# Altium PCB PCB1.PcbDoc
Units mil, origin at the board's own origin, x right, y up, seen from the top; angles counter-clockwise.
Board outline 6000 x 4000 mil, 2 copper layers (Top Layer, Bottom Layer); 52 components, 24 nets, 134 pads, 10 vias.
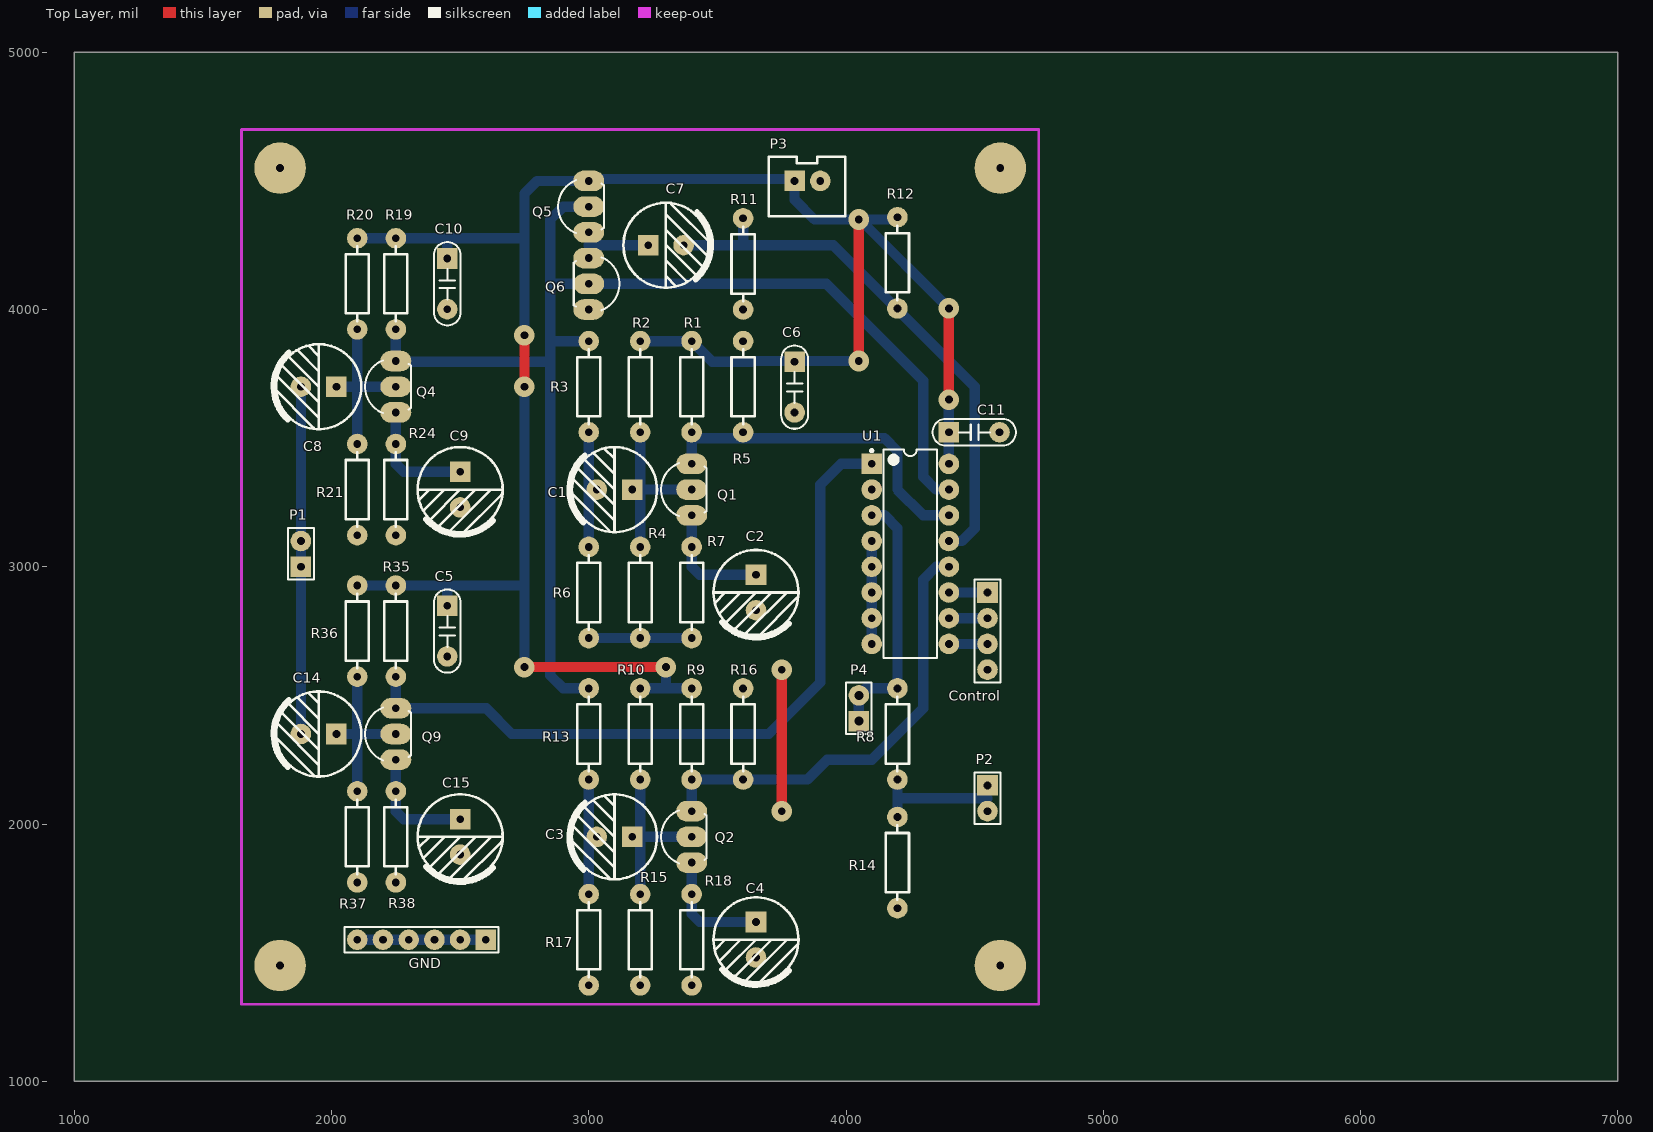
[diagram p0: Top Layer view]
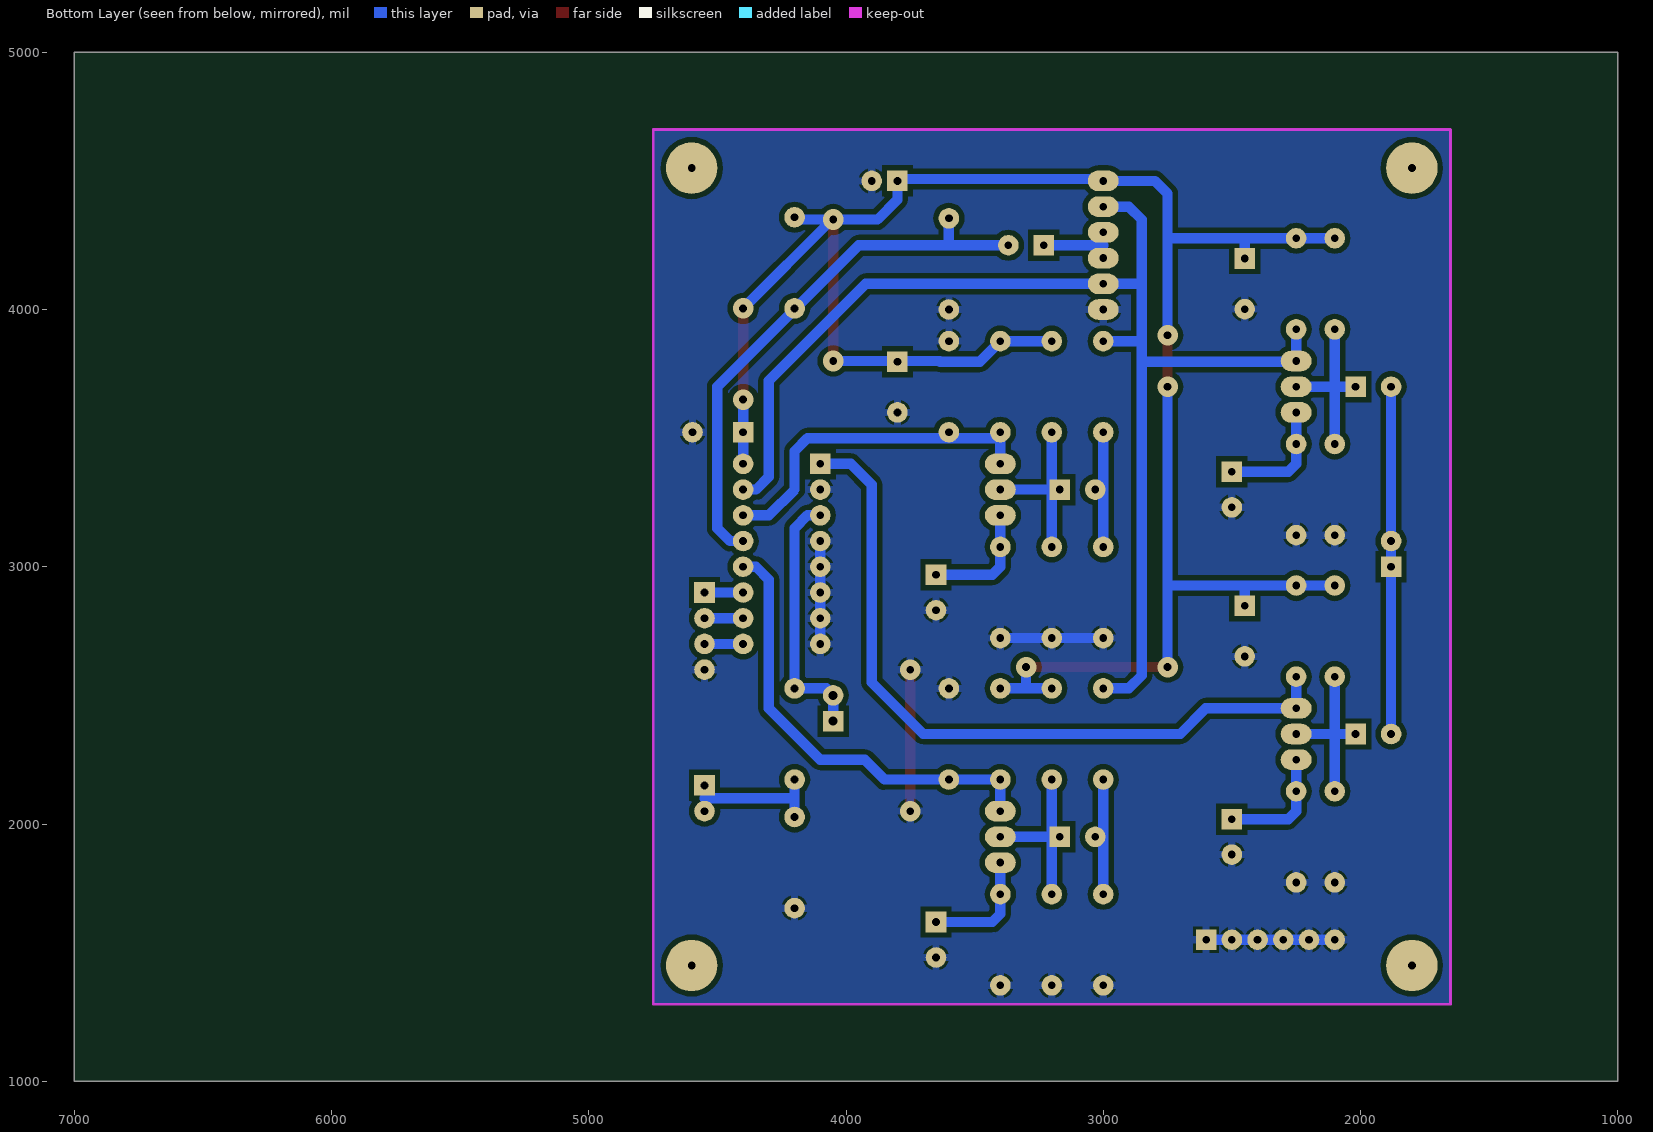
[diagram p1: Bottom Layer view, seen from below]

## Layer stack, top to bottom
Top Solder: solder mask 0.4, Solder Resist, Dk 3.5
Top Layer: signal copper 1.4
Dielectric 1: dielectric 12.6, FR-4, Dk 4.8
Bottom Layer: signal copper 1.4
Bottom Solder: solder mask 0.4, Solder Resist, Dk 3.5

## Board outline
1000,1000 7000,1000 7000,5000 1000,5000

## Design rules (kind name [scope] priority, off if disabled: settings)
Clearance [All] p1: gap=20 ignorepadtopadclearanceinfootprint=FALSE
PolygonConnect [All] p1: connectstyle=Relief reliefconductorwidth=30 reliefentries=4 polygonreliefangle="90 Angle" airgapwidth=10
RoutingVias [All] p1: holewidth=28 width=50 viastyle="Through Hole" minholewidth=28 minwidth=50 maxholewidth=28 maxwidth=50
SolderMaskExpansion [All] p1: expansion=4 istentingtop=FALSE
Width [All] p1: maxlimit=40 minlimit=10 preferedwidth=40
30 further rules are at their usual default settings.

## Components (designator, comment, footprint, x,y, rotation, side; value= is the part's Value field where it differs from the comment)
C1 "22u" "CS 3.5*8*8 - R" 3100,3300 r0 top
C2 "100u" "CS 3.5*8*8 - R" 3650,2900 r90 top
C3 "22u" "CS 3.5*8*8 - R" 3100,1950 r0 top
C4 "100u" "CS 3.5*8*8 - R" 3650,1550 r90 top
C5 "0.1uF" CBB-CL71 2450,2750 r270 top
C6 "0.1uF" CBB-CL71 3800,3698.43 r270 top
C7 "1u" "CS 3.5*8*8 - R" 3300,4250 r180 top
C8 "22u" "CS 3.5*8*8 - R" 1950,3700 r0 top
C9 "100u" "CS 3.5*8*8 - R" 2500,3300 r90 top
C10 "0.1uF" CBB-CL71 2450,4100 r270 top
C11 "0.1uF" CBB-CL71 4498.43,3522.83 r0 top
C14 "22u" "CS 3.5*8*8 - R" 1950,2350 r0 top
C15 "100u" "CS 3.5*8*8 - R" 2500,1950 r90 top
Control "CON4" HDR2.54-Y-LI-4P 4550,2750 r270 top
GND "GND" HDR1X6 2600,1550 r180 top
P1 "input" HDR1X2#1 1881.1,3000 r90 top
P2 "output" HDR1X2#1 4550,2150 r270 top
P3 "VCC/GND" XH2.54-LI-2P 3850,4500 r0 top
P4 "Output" HDR1X2#2 4050,2400 r90 top
Q1 "S9013" TO92 3400,3300 r90 top
Q2 "S9013" TO92 3400,1950 r90 top
Q4 "S9013" TO92 2250,3700 r90 top
Q5 "S9013" TO92 3000,4400 r90 top
Q6 "S9012" TO92 3000,4100 r270 top
Q9 "S9013" TO92 2250,2350 r90 top
R1 "2k" "RS 1/4W" 3400,3700 r90 top
R2 "75k" "RS 1/4W" 3200,3700 r90 top
R3 "24k" "RS 1/4W" 3000,3700 r90 top
R4 "10k" "RS 1/4W" 3200,2900 r90 top
R5 "3k" "RS 1/4W" 3600,3700 r270 top
R6 "810" "RS 1/4W" 3000,2900 r90 top
R7 "750" "RS 1/4W" 3400,2900 r90 top
R8 "47k" "RS 1/4W" 4200,2350 r90 top
R9 "2k" "RS 1/4W" 3400,2350 r90 top
R10 "43k" "RS 1/4W" 3200,2350 r90 top
R11 "100k" "RS 1/4W" 3600,4177.17 r90 top
R12 "100k" "RS 1/4W" 4200,4181.5 r90 top
R13 "15k" "RS 1/4W" 3000,2350 r90 top
R14 "33k" "RS 1/4W" 4200,1850 r90 top
R15 "10k" "RS 1/4W" 3200,1550 r90 top
R16 "1.5k" "RS 1/4W" 3600,2350 r270 top
R17 "47k" "RS 1/4W" 3000,1550 r90 top
R18 "750" "RS 1/4W" 3400,1550 r90 top
R19 "4.7k" "RS 1/4W" 2250,4100 r90 top
R20 "56k" "RS 1/4W" 2100,4100 r90 top
R21 "10k" "RS 1/4W" 2100,3300 r90 top
R24 "750" "RS 1/4W" 2250,3300 r90 top
R35 "4.3k" "RS 1/4W" 2250,2750 r90 top
R36 "39k" "RS 1/4W" 2100,2750 r90 top
R37 "10k" "RS 1/4W" 2100,1950 r90 top
R38 "750" "RS 1/4W" 2250,1950 r90 top
U1 "CD4051BCN" N16E 4250,3050 r0 top

## Footprints (in the part's own frame and the unit in brackets; to place one, negate y for a bottom-side part, rotate by r counter-clockwise, add the part's x,y. Pads: shape width x height; smd on the part's side, far side on the other; paste and mask are expansions set on the pad)
CBB-CL71 [mil] "7.2mm*2.3mm*6.5mm(长*宽*高）"
  rect 80x80 hole 30: 1(-98.43,0)
  round 80 hole 30: 2(98.43,0)
  silkscreen extent -162,-52 162,52, body extent -142,-45 142,45, height 258
"CS 3.5*8*8 - R" [mil] "脚距3.5mm , 直径8mm , 高8mm"
  rect 80x80 hole 30: 1(68.9,0)
  round 80 hole 30: 2(-68.9,0)
  silkscreen extent -180,-165 165,165, body extent -157,-157 157,157, height 316
HDR1X2#1 [mil] "Connector; Header; 2 Position"
  rect 80x80 hole 30: 1(0,0)
  round 80 hole 30: 2(100,0)
  silkscreen extent -50,-50 150,50
HDR1X2#2 [mil] "Connector; Header; 2 Position"
  rect 80x80 hole 35.43: 1(0,0)
  round 80 hole 35.43: 2(100,0)
  silkscreen extent -50,-50 150,50
HDR1X6 [mil] "Connector; Header; 6 Position"
  rect 80x80 hole 30: 1(0,0)
  round 80 hole 30: 2(100,0) 3(200,0) 4(300,0) 5(400,0) 6(500,0)
  silkscreen extent -50,-50 550,50
HDR2.54-Y-LI-4P [mil] "圆孔排母，4脚"
  rect 80x80 hole 30: 1(-150,0)
  round 80 hole 30: 2(-50,0) 3(50,0) 4(150,0)
  silkscreen extent -200,-50 200,50, body extent -200,-50 200,50, height 170
N16E [mil] "DIP, 16-Leads, Row Spacing 7.62mm, Pitch 2.54mm, Body 19.3x6.35mm"
  rect 80x80 hole 30: 1(-150,350)
  round 80 hole 30: 2(-150,250) 3(-150,150) 4(-150,50) 5(-150,-50) 6(-150,-150) 7(-150,-250) 8(-150,-350) 9(150,-350) 10(150,-250) 11(150,-150) 12(150,-50) 13(150,50) 14(150,150) 15(150,250) 16(150,350)
  silkscreen extent -155,-406 104,406, body extent -142,-405 142,405, height 200
"RS 1/4W" [mil] "直插色环电阻，脚距9mm，直径2.3mm"
  round 80 hole 30: 1(-177.17,0) 2(177.17,0)
  silkscreen extent -145,-45 145,45, body extent -186,-46 186,46, height 91
TO92 [mil]
  oval 80x120 hole 30: 1(-100,0) 2(0,0) 3(100,0)
  silkscreen extent -103,-58 103,119
XH2.54-LI-2P [mil] "接插件，2P"
  rect 80x80 hole 30: 1(-50,0)
  round 80 hole 30: 2(50,0)
  silkscreen extent -150,-138 147,93, body extent -148,-130 148,94, height 278

## Part data
C1 C2 C3 C4 C7 C8 C9 C14 C15: library part C-CS, "直插固态电容", BOM名称=直插固态电容, 学习资源=www.ooocke.com, 版权归属=源创客
C5 C6 C10 C11: library part C-CBB, "CBB电容", BOM名称=CBB电容, 学习资源=www.ooocke.com, 版权归属=源创客
Control: "Connector"
GND: library part "Header 6", "Header, 6-Pin", LatestRevisionDate=17-Jul-2002, LatestRevisionNote="Re-released for DXP Platform.", Publisher="Altium Limited"
P1 P2 P3 P4: library part "Header 2", "Header, 2-Pin", LatestRevisionDate=17-Jul-2002, LatestRevisionNote="Re-released for DXP Platform.", Publisher="Altium Limited"
Q1 Q2 Q4 Q5 Q9: library part 9013-DIP, "低频放大-NPN型", BOM名称=低频放大-NPN型, 学习资源=www.ooocke.com, 属性="50V 0.5A 0.625W", 版权归属=源创客
Q6: library part 9012-DIP, "低频放大-PNP型", BOM名称=低频放大-PNP型, 学习资源=www.ooocke.com, 属性="50V 0.5A 0.625W", 版权归属=源创客
R1 R2 R3 R4 R5 R6 R7 R8 R9 R10 R11 R12 R13 R14 R15 R16 R17 R18 R19 R20 R21 R24 R35 R36 R37 R38: library part R-CRR, "直插色环电阻", BOM名称=色环电阻, 学习资源=www.ooocke.com, 版权归属=源创客
U1: "8-Channel Analog Multiplexer/Demultiplexer", ComponentLink1Description="Manufacturer Link", ComponentLink1URL=http://www.fairchildsemi.com/, ComponentLink2Description=Datasheet, ComponentLink2URL=http://www.fairchildsemi.com/ds/CD%2FCD4052BC.pdf, DatasheetVersion=Jan-1999, LatestRevisionDate=29-May-2009, LatestRevisionNote="Component Body Added.", PackageDescription="DIP, 16-Pin, Row Spacing 7.62 mm, Pitch 2.54 mm", PackageReference=N16E, PackageVersion=2000, Published=17-Jul-2002, Publisher="Altium Limited"

## Free pads (board coordinates)
  round 200 hole 30: 2(1800,4550) 3(1800,1450) 4(4600,1450) 5(4600,4550)

## Via types
v1: diameter 80, hole 30, Top Layer to Bottom Layer, 10 vias

## Nets (pads, with @x,y where several pads share a name; then routed paths per layer and width w, separated by ;. In a path a pad name is that pad's centre, name@x,y a point inside that pad or via, vN(x,y) a via of type N, cw(c..) or ccw(c..) an arc to the next point about the centre after c; other vN are vias at no path point)
+12: C5.1 C6.1 C10.1 C11.1 P3.1 Q5.3 R1.2 R2.2 R9.2 R10.2 R12.2 R19.2 R20.2 R35.2 R36.2 U1.16 | length 8268.4
  Top Layer w40: v1(2750,2610) v1(3300,2610) ; v1(2750,3700) v1(2750,3900) ; v1(4050,3800) v1(4050,4350) ; v1(4400,3650) v1(4400,4004.33)
  Bottom Layer w40: R36.2 R35.2 2450,2927.17 ; R20.2 R19.2 2450,4277.17 ; C5.1 2450,2927.17 ; C10.1 2450,4277.17 ; v1(2750,2610) 2750,2927.17 ; v1(2750,3700) 2750,2927.17 ; v1(2750,3900) 2750,4277.17 ; R10.2 3300,2527.17 ; R2.2 R1.2 3480,3797.17 3633.14,3797.17 3635.97,3800 v1(4050,3800) ; v1@3317.17,2610 v1(3300,2610) 3300,2527.17 ; R9.2 3300,2527.17 ; R12.2 4191.34,4350 v1@4054.33,4350 ; U1.16 C11.1 v1(4400,3650) ; v1(4400,4004.33) v1@4054.33,4350 ; 2450,2927.17 2750,2927.17 ; 2450,4277.17 2750,4277.17 ; 2750,4277.17 2750,4450 2800,4500 Q5.3 3000,4507.17 3800,4507.17 P3.1 3800,4427.17 3877.17,4350 v1(4050,4350) v1@4054.33,4350
GND: C2.2 C4.2 C5.2 C6.2 C9.2 C10.2 C11.2 C15.2 Control.4 GND.1 GND.2 GND.3 GND.4 GND.5 GND.6 P3.2 Q6.3 R4.1 R5.1 R6.1 R7.1 R11.1 R14.1 R15.1 R16.1 R17.1 R18.1 R21.1 R24.1 R37.1 R38.1 U1.2 U1.4 U1.5 U1.6 U1.7 U1.8 | length 1868.5
  Top Layer w40: v1(3750,2050) v1(3750,2600) ; U1.2@4089.18,3300 U1.2 ; U1.2@4110.82,3307.65 U1.2@4118.48,3307.65
  Bottom Layer w40: GND.6 GND.5 GND.4 GND.3 GND.2 GND.1 ; R6.1 R4.1 R7.1 ; U1.8 U1.7 U1.6 U1.5 U1.4
NetC1_1: C1.1 Q1.2 R2.1 R4.2 | length 676.8
  Bottom Layer w40: C1.1 C1.1@3200,3300 ; R4.2 C1.1@3200,3300 ; R2.1 C1.1@3200,3300 ; Q1.2 C1.1@3200,3300
NetC1_2: C1.2 R3.1 R6.2 | length 445.7
  Bottom Layer w40: R6.2 R3.1
NetC2_1: C2.1 Q1.1 R7.2 | length 462.9
  Bottom Layer w40: Q1.1 R7.2 3400,3000 3431.1,2968.9 C2.1
NetC3_1: C3.1 Q2.2 R10.1 R15.2 | length 676.8
  Bottom Layer w40: C3.1 C3.1@3200,1950 ; R15.2 C3.1@3200,1950 ; R10.1 C3.1@3200,1950 ; Q2.2 C3.1@3200,1950
NetC3_2: C3.2 R13.1 R17.2 | length 445.7
  Bottom Layer w40: R17.2 R13.1
NetC4_1: C4.1 Q2.1 R18.2 | length 462.9
  Bottom Layer w40: Q2.1 R18.2 3400,1650 3431.1,1618.9 C4.1
NetC7_1: C7.1 Q5.1 Q6.1 | length 231.1
  Bottom Layer w40: 3000,4250 C7.1
NetC7_2: C7.2 R11.2 R12.1 U1.13 | length 2134
  Bottom Layer w40: C7.2 3600,4250 ; R11.2 3600,4250 ; U1.13 4450,3100 4500,3150 4500,3700 3950,4250 3600,4250
NetC8_1: C8.1 Q4.2 R20.1 R21.2 | length 676.8
  Bottom Layer w40: C8.1 2100,3700 ; R21.2 2100,3700 ; R20.1 2100,3700 ; Q4.2 2100,3700
NetC8_2: C8.2 C14.2 P1.1 P1.2 | length 1350
  Bottom Layer w40: C14.2 P1.1 P1.2 C8.2
NetC9_1: C9.1 Q4.1 R24.2 | length 462.9
  Bottom Layer w40: Q4.1 R24.2 2250,3400 2281.1,3368.9 C9.1
NetC14_1: C14.1 Q9.2 R36.1 R37.2 | length 676.8
  Bottom Layer w40: C14.1 2100,2350 ; R37.2 2100,2350 ; R36.1 2100,2350 ; Q9.2 2100,2350
NetC15_1: C15.1 Q9.1 R38.2 | length 462.9
  Bottom Layer w40: Q9.1 R38.2 2250,2050 2281.1,2018.9 C15.1
NetControl_1: Control.1 U1.11 | length 150
  Bottom Layer w40: U1.11 Control.1
NetControl_2: Control.2 U1.10 | length 150
  Bottom Layer w40: U1.10 Control.2
NetControl_3: Control.3 U1.9 | length 150
  Bottom Layer w40: U1.9 Control.3
NetP2_1: P2.1 P2.2 R8.1 R14.2 | length 495.7
  Bottom Layer w40: R14.2 4200,2100 ; R8.1 4200,2100 ; 4550,2100 4200,2100
NetP4_1: P4.1 P4.2 R8.2 U1.3 | length 1004.8
  Bottom Layer w40: P4.1 P4.2 4077.17,2527.17 R8.2 4200,3150 4150,3200 U1.3
NetQ1_3: Q1.3 R1.1 R5.2 U1.14 | length 1344.4
  Bottom Layer w40: Q1.3 R1.1 3422.83,3500 4150,3500 4200,3450 4200,3300 4300,3200 U1.14
NetQ2_3: Q2.3 R9.1 R16.2 U1.12 | length 1758.4
  Bottom Layer w40: Q2.3 R9.1 R16.2 3850,2172.83 3927.17,2250 4100,2250 4300,2450 4300,2950 4350,3000 U1.12
NetQ4_3: Q4.3 Q5.2 Q6.2 R3.2 R13.2 R19.1 U1.15 | length 5089.7
  Bottom Layer w40: R19.1 Q4.3 2250,3797.17 2850,3797.17 ; R13.2 2900,2527.17 2850,2577.17 2850,3797.17 ; R3.2 2850,3877.17 ; Q5.2 2900,4400 2850,4350 2850,4100 ; U1.15 4350,3300 4300,3350 4300,3722.83 3922.83,4100 Q6.2 2850,4100 ; 2850,3797.17 2850,3877.17 ; 2850,3877.17 2850,4100
NetQ9_3: Q9.3 R35.1 U1.1 | length 2899.6
  Bottom Layer w40: R35.1 Q9.3 2600.93,2450 2700.93,2350 3700,2350 3900,2550 3900,3318.9 3981.1,3400 U1.1

## Polygon pours and split planes (outlines as drawn)
GND on Bottom Layer "Bottom Layer-No Net" (solid, remove dead copper, pour order 7): 1650,4700 4750,4700 4750,1300 1650,1300

## Keep-outs
Keep-Out Layer:
  lines w10: 1650,1300 1650,4700 4750,4700 4750,1300 1650,1300